# Altium PCB OpenMEA_Power_V002.PcbDoc
Units mm, origin at the board's own origin, x right, y up, seen from the top; angles counter-clockwise.
Board outline 47.35 x 75.04 mm, 4 copper layers (Top Copper Layer, Internal Copper Layer 1, Internal Copper Layer 2, Bottom Copper Layer), stack 1.58 mm thick; 40 components, 27 nets, 139 pads, 18 vias.
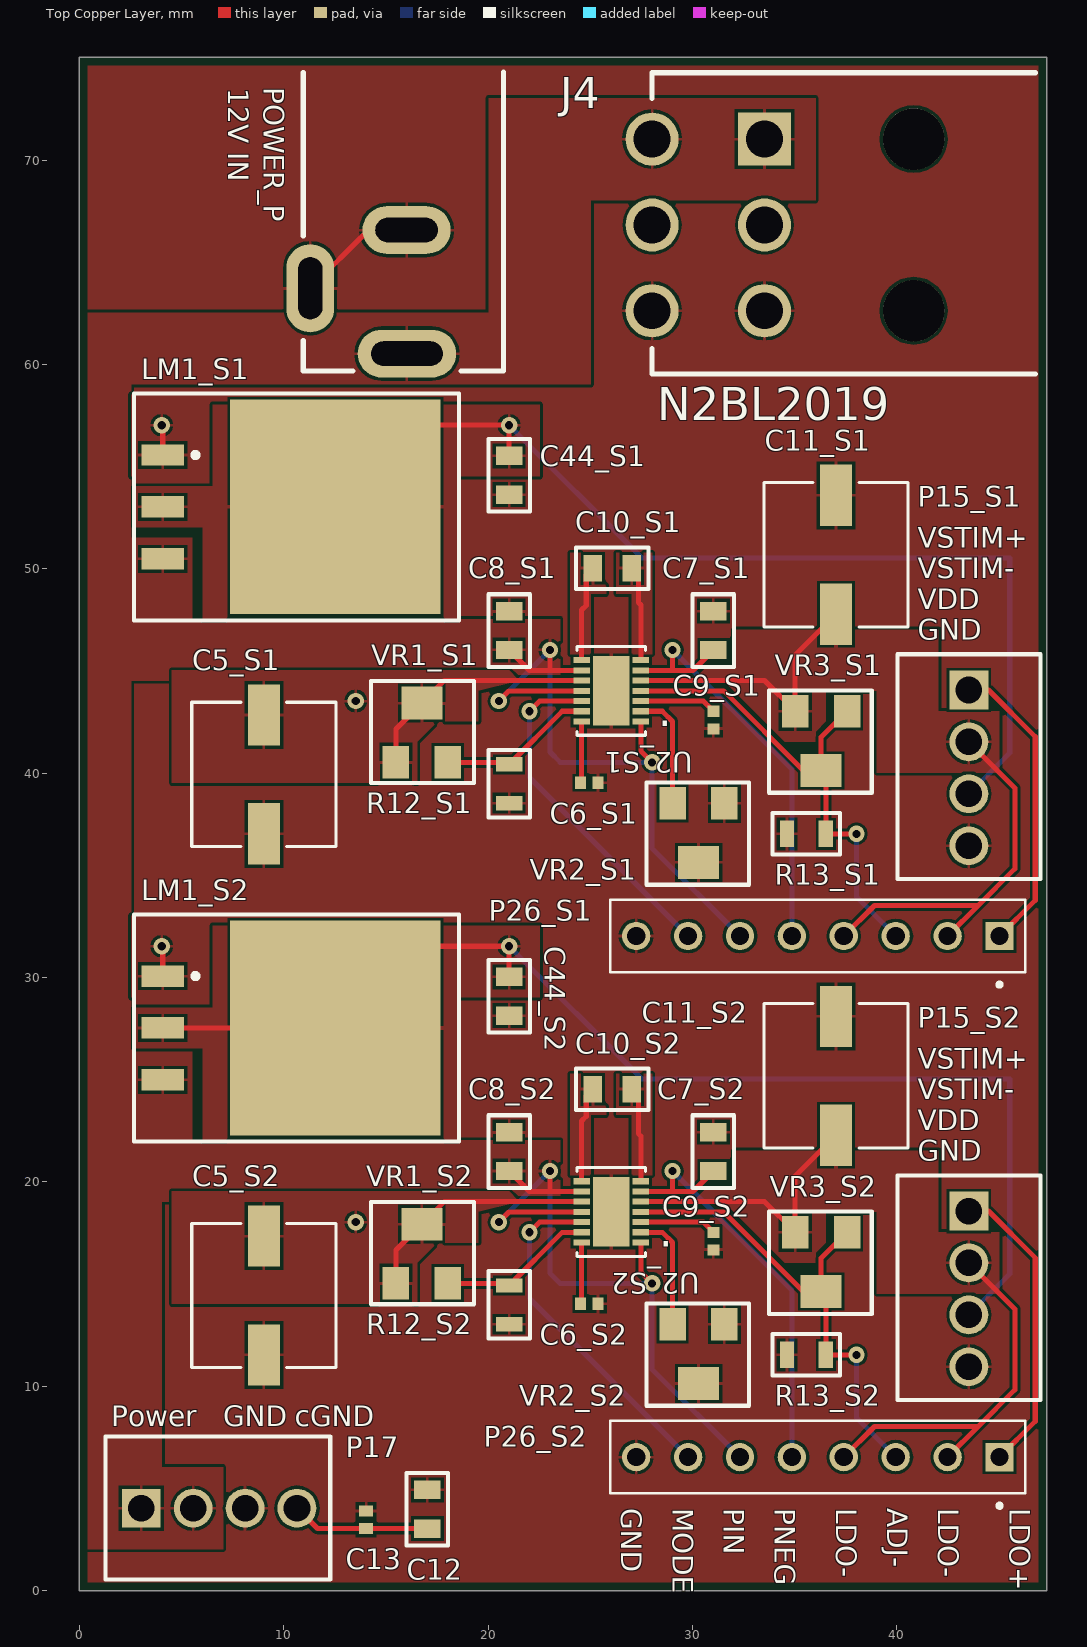
[diagram p0: Top Copper Layer view]
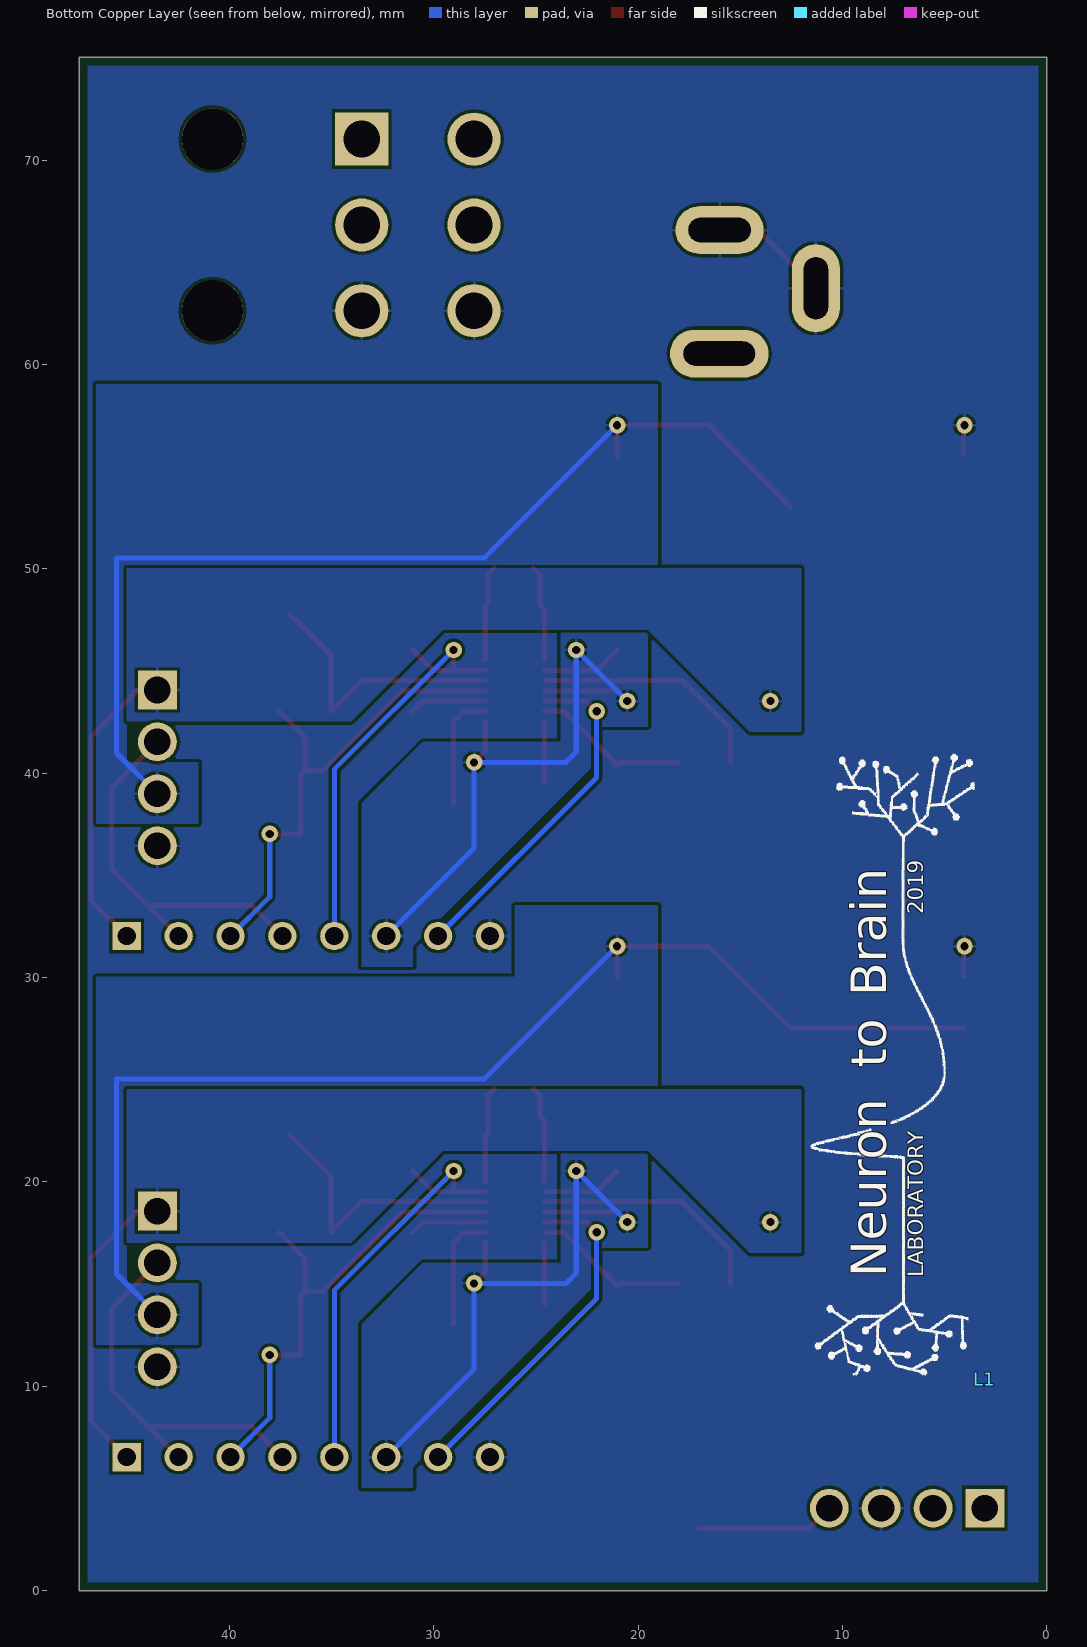
[diagram p1: Bottom Copper Layer view, seen from below]
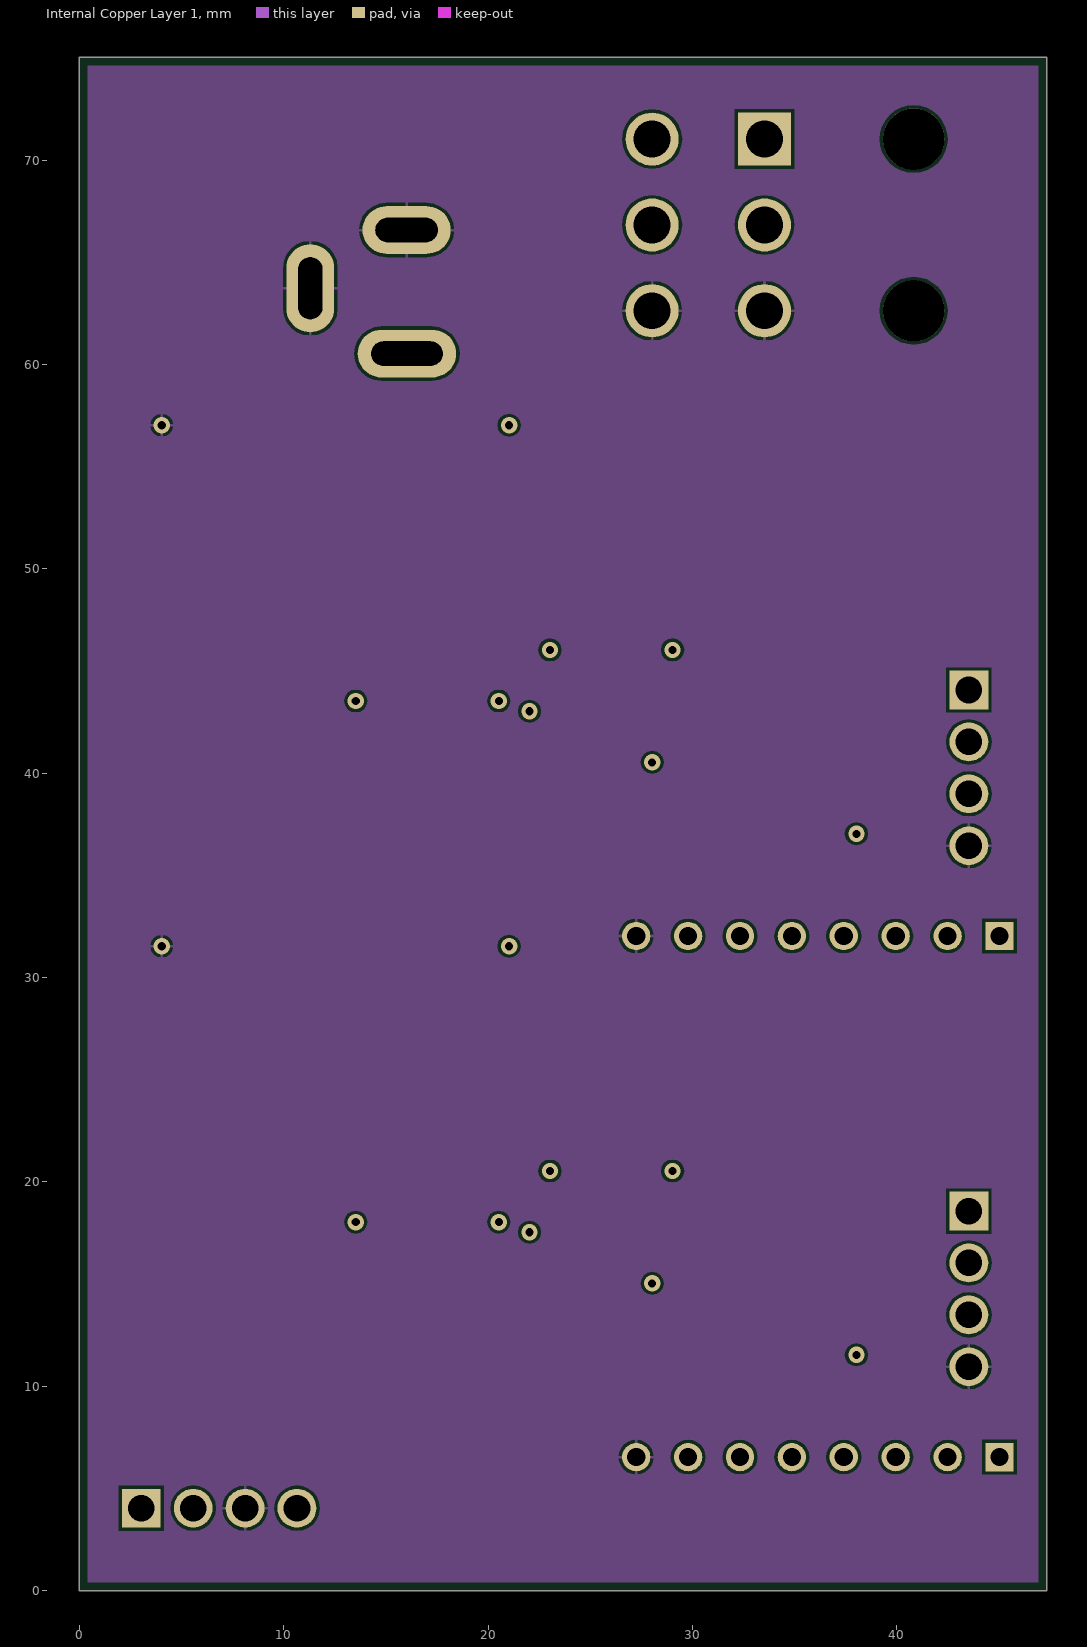
[diagram p2: Internal Copper Layer 1]
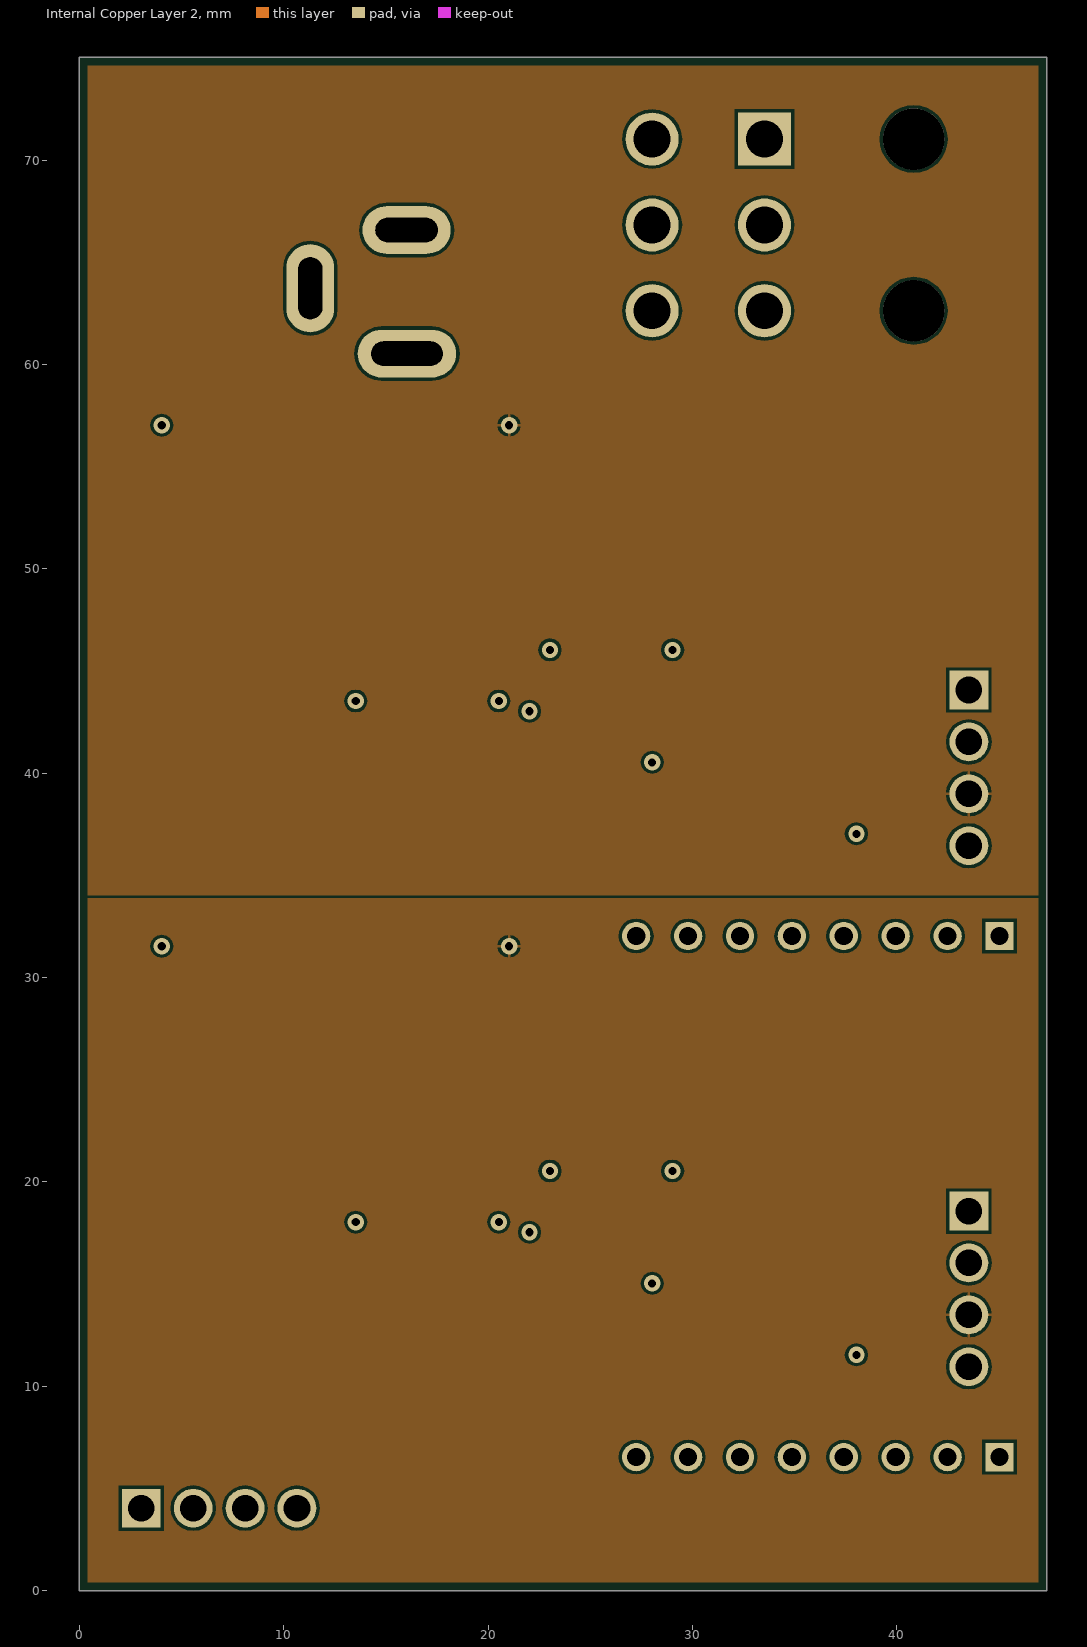
[diagram p3: Internal Copper Layer 2]

## Layer stack, top to bottom
Top Solder: solder mask 0.01, Solder Resist, Dk 3.5
Top Copper Layer: signal copper 0.035
Dielectric 1: prepreg 0.22, FR-4, Dk 4.2
Internal Copper Layer 1: signal copper 0.035
Dielectric 2: core 1, FR-4, Dk 4.2
Internal Copper Layer 2: signal copper 0.035
Dielectric 3: prepreg 0.22, FR-4, Dk 4.2
Bottom Copper Layer: signal copper 0.035
Bottom Solder: solder mask 0.01, Solder Resist, Dk 3.5

## Board outline
0,0 47.346,0 47.346,75.035 0,75.035

## Design rules (kind name [scope] priority, off if disabled: settings)
BoardOutlineClearance [All] p1: gap=0.4 ignorepadtopadclearanceinfootprint=FALSE
Clearance [All] p1: gap=0.15 ignorepadtopadclearanceinfootprint=TRUE
ComponentClearance [All] p1: gap=0.15 collisioncheckmode=3 verticalgap=0.15 showdistances=FALSE
HoleSize [All] p1: absolutevalues=TRUE maxlimit=0.4 minlimit=0.25 maxpercent=80.000 minpercent=20.000
HoleToHoleClearance [All] p1: gap=0.45 allowstackedmicrovias=TRUE
MinimumAnnularRing [All] p1: minimumring=0.15
MinimumSolderMaskSliver [All] p1: minsoldermaskwidth=0.15
PlaneClearance [All] p1: clearance=0.15
PlaneConnect [All] p1: planeconnectstyle=Relief reliefexpansion=0.25 reliefentries=4 reliefconductorwidth=0.15 reliefairgap=0.15
PolygonConnect [All] p1: connectstyle=Relief reliefconductorwidth=0.15 reliefentries=4 polygonreliefangle="90 Angle" airgapwidth=0.15
RoomDefinition OpenMEA_Power_V002 [InComponentClass('OpenMEA_Power_V002')] p1 off: confinementstyle=ConfineIn formatcopy=TRUE lockcomponents=FALSE outline -55.829,-20.592 -5.029,-20.592 -5.029,4.808 -55.829,4.808
RoutingVias [All] p1: holewidth=0.25 width=0.55 viastyle="Through Hole" minholewidth=0.25 minwidth=0.55 maxholewidth=0.4 maxwidth=0.8
SilkToSilkClearance [All] p1: silktosilkclearance=0.2
SilkToSolderMaskClearance [IsPad] p1: minsilkscreentomaskgap=0.2 clearancetoexposedcopper=TRUE
SolderMaskExpansion [All] p1: expansion=0 istentingtop=FALSE
Width [All] p1: maxlimit=50 minlimit=0.15 preferedwidth=0.15
22 further rules are at their usual default settings.

## Classes and differential pairs
component class S1: C5_S1 C6_S1 C7_S1 C8_S1 C9_S1 C10_S1 C11_S1 C44_S1 LM1_S1 P15_S1 P26_S1 R12_S1 R13_S1 U2_S1 VR1_S1 VR2_S1 VR3_S1
component class OpenMEA_Power_V002: C12 C13 J4 L1 P17 POWER_P
component class S2: C5_S2 C6_S2 C7_S2 C8_S2 C9_S2 C10_S2 C11_S2 C44_S2 LM1_S2 P15_S2 P26_S2 R12_S2 R13_S2 U2_S2 VR1_S2 VR2_S2 VR3_S2
channel class vstim_power: S1 S2

## Components (designator, comment, footprint, x,y, rotation, side; value= is the part's Value field where it differs from the comment)
C5_S1 "100uF" CAP_EEFK_D 9.029,39.944 r90 top (schematic designator C5)
C5_S2 "100uF" CAP_EEFK_D 9.029,14.444 r90 top (schematic designator C5)
C6_S1 "capacitor_npol_ame" rcl_0402i_1005m_nominal 24.959,39.535 r180 top value=10nF (schematic designator C6)
C6_S2 "capacitor_npol_ame" rcl_0402i_1005m_nominal 24.959,14.035 r180 top value=10nF (schematic designator C6)
C7_S1 "10uF" C0805 31.029,47.935 r270 top (schematic designator C7)
C7_S2 "10uF" C0805 31.029,22.435 r270 top (schematic designator C7)
C8_S1 "10uF" C0805 21.029,47.935 r270 top (schematic designator C8)
C8_S2 "10uF" C0805 21.029,22.435 r270 top (schematic designator C8)
C9_S1 "capacitor_npol_ame" rcl_0402i_1005m_nominal 31.029,42.605 r90 top value=10nF (schematic designator C9)
C9_S2 "capacitor_npol_ame" rcl_0402i_1005m_nominal 31.029,17.105 r90 top value=10nF (schematic designator C9)
C10_S1 "1uF" C0805 25.129,50.035 r0 top (schematic designator C10)
C10_S2 "1uF" C0805 25.129,24.535 r0 top (schematic designator C10)
C11_S1 "100uF" CAP_EEFK_D 37.029,50.694 r270 top (schematic designator C11)
C11_S2 "100uF" CAP_EEFK_D 37.029,25.194 r270 top (schematic designator C11)
C12 "10uF" C0805 17.029,3.035 r90 top
C13 "capacitor_npol_ame" rcl_0402i_1005m_most 14.029,3.465 r90 top value=100nF
C44_S1 "1uF" C0805 21.029,53.635 r90 top (schematic designator C44)
C44_S2 "1uF" C0805 21.029,28.135 r90 top (schematic designator C44)
J4 "0039301060" 0039301060 33.529,71.035 r90 top
L1 "Logo" N2BL_LOGO 3.029,10.347 r90 bottom
LM1_S1 "3.3V" LM1085 4.079,55.575 r270 top (schematic designator LM1)
LM1_S2 "3.3V" LM1085 4.079,30.075 r270 top (schematic designator LM1)
P15_S1 "Header 4" OSTVN04A150 43.529,44.075 r270 top (schematic designator P15)
P15_S2 "Header 4" OSTVN04A150 43.529,18.575 r270 top (schematic designator P15)
P17 "Header 4" OSTVN04A150 3.029,4.035 r0 top
P26_S1 "Header 8" TE_5-535541-6 36.139,32.035 r180 top (schematic designator P26)
P26_S2 "Header 8" TE_5-535541-6 36.139,6.535 r180 top (schematic designator P26)
POWER_P "PWR2.1MM" POWER2.1MM 16.029,60.535 r90 top
R12_S1 "100KR" R0805 21.029,38.535 r90 top (schematic designator R12)
R12_S2 "100KR" R0805 21.029,13.035 r90 top (schematic designator R12)
R13_S1 "100KR" R0805 36.529,37.035 r180 top (schematic designator R13)
R13_S2 "100KR" R0805 36.529,11.535 r180 top (schematic designator R13)
U2_S1 "Part Number: ltc3260ide" DFN-14_DE 26.029,44.035 r180 top value=Value (schematic designator U2)
U2_S2 "Part Number: ltc3260ide" DFN-14_DE 26.029,18.535 r180 top value=Value (schematic designator U2)
VR1_S1 "Tunable 1M Max" res_var_5turn 15.489,40.535 r0 top (schematic designator VR1)
VR1_S2 "Tunable 1M Max" res_var_5turn 15.489,15.035 r0 top (schematic designator VR1)
VR2_S1 "Tunable 1M Max" res_var_5turn 31.569,38.535 r180 top (schematic designator VR2)
VR2_S2 "Tunable 1M Max" res_var_5turn 31.569,13.035 r180 top (schematic designator VR2)
VR3_S1 "Tunable 1M Max" res_var_5turn 37.569,43.035 r180 top (schematic designator VR3)
VR3_S2 "Tunable 1M Max" res_var_5turn 37.569,17.535 r180 top (schematic designator VR3)

## Footprints (in the part's own frame and the unit in brackets; to place one, negate y for a bottom-side part, rotate by r counter-clockwise, add the part's x,y. Pads: shape width x height; smd on the part's side, far side on the other; paste and mask are expansions set on the pad)
0039301060 [mm]
  rect 2.6x2.6 hole 1.8: 1(0,0)
  round 2.6 hole 1.8: 2(-4.2,0) 3(-8.4,0) 4(0,5.5) 5(-4.2,5.5) 6(-8.4,5.5)
  round 3 hole 3 unplated: M1(0,-7.3) M2(-8.4,-7.3)
  silkscreen extent -11.5,-13.25 3.25,5.5, body extent -11.1,-13.83 3.1,6.1, height 12.4
C0805 [mm]
  rect 0.9x1.3 smd: 1(0,0) 2(1.9,0)
  silkscreen extent -0.83,-1.02 2.73,1.02, body extent -0.05,-0.6 1.95,0.6, height 1.46
CAP_EEFK_D [mil] "CAP ALUM 100UF 20% 35V SMD"
  rect 118x62 smd paste+0 mask+0: 1(-114.5,0) 2(114.5,0)
  silkscreen extent -139,-139 139,139, body extent -154,-134 154,134, height 242
DFN-14_DE [mm]
  rect 0.805x0.3 smd: 1(-1.452,1.5) 2(-1.452,1) 3(-1.452,0.5) 4(-1.452,0) 5(-1.452,-0.5) 6(-1.452,-1) 7(-1.452,-1.5) 8(1.452,-1.5) 9(1.452,-1) 10(1.452,-0.5) 11(1.452,0) 12(1.452,0.5) 13(1.452,1) 14(1.452,1.5)
  rect 1.8x3.4 smd paste-1.687: 15(0,0)
  silkscreen extent -1.68,-2.18 1.68,2.18, body extent 0,0 0.25,0.25, height 0.25
LM1085 [mm] "D2-PAK; 3 Leads; Body 14.4 (inc. leads) x 10.4 mm (LxW max)"
  rect 1.05x2.1 smd: 1(0,0) 2(2.54,0) 3(5.08,0)
  rect 10.5x10.3 smd: 2(2.54,8.45)
  silkscreen extent -3.01,-1.4 8.09,14.5, body extent -2.54,-0.87 7.62,14.37, height 4.54
N2BL_LOGO [mm] "Example template footprint"
  silkscreen extent 0.2,0.49 30.61,8.52
OSTVN04A150 [mm] "4 Position Wire to Board Terminal Block Horizontal with Board 0.100\" (2.54mm) Through Hole"
  rect 1.9x1.9 hole 1.3: 1(0,0)
  round 1.9 hole 1.3: 2(2.54,0) 3(5.08,0) 4(7.62,0)
  silkscreen extent -1.75,-3.5 9.25,3.5, body extent -1.47,-3.25 9.09,3.25, height 8.65
POWER2.1MM [mil]
  oval 92x190 hole 47 slot 138 at 90 deg: 1(0,0)
  oval 170x92 hole 47 slot 120 at 0 deg: 2(126,186.17)
  oval 92x170 hole 47 slot 120 at 90 deg: 3(238.19,0.55)
  silkscreen extent -33,-186 542,200, body extent -25,-178 542,192, height 434
R0805 [mm]
  rect 0.7x1.3 smd: 1(0,0) 2(1.9,0)
  silkscreen extent -0.7,-1.02 2.6,1.02, body extent -0.05,-0.6 1.95,0.6, height 0.71
rcl_0402i_1005m_most [mm] "Chip RCL, 0402 Imperial, 1005 Metric, 2-Leads, Body 1.00x0.5mm, IPC Most Land (Low Density)"
  rect 0.54x0.7 smd: 1(-0.43,0) 2(0.43,0)
  body extent -0.5,-0.25 0.5,0.25, height 0.5
rcl_0402i_1005m_nominal [mm] "Chip RCL, 0402 Imperial, 1005 Metric, 2-Leads, Body 1.00x0.5mm, IPC Nominal Medium Density"
  rect 0.54x0.6 smd: 1(-0.43,0) 2(0.43,0)
  body extent -0.5,-0.25 0.5,0.25, height 0.5
res_var_5turn [mm]
  rect 1.3x1.6 smd: 1(0,0) 3(2.54,0)
  rect 2x1.6 smd: 2(1.27,2.9)
  silkscreen extent -1.21,-1.02 3.82,3.99, body extent -1.1,-0.52 3.7,3.38, height 5.31
TE_5-535541-6 [mil] "CONN RCPT 8POS 0.1 GOLD PCB"
  rect 54.65x54.65 hole 35: 1(-350,0)
  round 54.65 hole 35: 2(-250,0) 3(-150,0) 4(-50,0) 5(50,0) 6(150,0) 7(250,0) 8(350,0)
  silkscreen extent -400,-70 400,98, body extent -400,-70 400,70, height 275

## Part data
C5_S1 C5_S2 C11_S1 C11_S2: library part C2012X5R1E106K085AC, "CAP ALUM 100UF 20% 35V SMD", Dielectric="Electrolytic Capacitor", Dielectric Material=N/A, ESR (Equivalent Series Resistance)="260mOhm @ 100kHz", Manufacturer="Panasonic Electronic Components", Manufacturer Part Number=EEE-FT1V101AP, Max Operating Temperature=105°C, Min Operating Temperature=-55°C, Package Type="Radial Can, SMT", Ripple Current @ High Frequency="300mA @ 100kHz", Ripple Current @ Low Frequency="195mA @ 120Hz", Supplier Part Number 1=PCE5016CT-ND, Tolerance=20%, Voltage Rating=35V, Capacitance=100uF, ComponentLink1Description=Datasheet, ComponentLink1URL=https://industrial.panasonic.com/cdbs/www-data/pdf/RDE0000/ABA0000C1240.pdf, ComponentLink2Description=NamingScheme, ComponentLink2URL=https://industrial.panasonic.com/cdbs/www-data/pdf/RDE0000/DME0000COL90.pdf, Diam.=6.3mm, Height=6.1mm, Length=6.6mm, Mount="Surface Mount", Packaging="Cut Tape (CT)", Polarization=Polarized, Pricing 1="1=0.86;  10=0.605;  100=0.3984  (CAD)", Stock 1=336,289, Supplier 1=Digi-Key, Supplier Link 1=https://www.digikey.ca/product-detail/en/panasonic-electronic-components/EEE-FT1V101AP/PCE5016CT-ND/2652071, Termination=SMD/SMT, Voltage Rating (DC)=35V, Width=6.6mm
C6_S1 C6_S2 C9_S1 C9_S2: "Capacitor Non-polarized American Symbol", Case Code=0402, Manufacturer="Murata Electronics North America", Manufacturer Part Number=GRM155R71E103KA01D, Supplier Part Number 1=490-1312-1-ND, Tolerance=10%, Voltage Rating=25V, ComponentLink1Description="Reference Sheet", ComponentLink1URL=https://search.murata.co.jp/Ceramy/image/img/A01X/G101/ENG/GRM155R71E103KA01-01.pdf, Pricing 1="1=0.14;  10=0.042;  100=0.0188;  500=0.01346;  1000=0.01058;  3500=0.00961;  5000=0.00884  (CAD)", Stock 1=4961, Supplier 1=Digikey, Supplier Link 1=https://www.digikey.ca/products/en?keywords=490-1312-1-ND
C7_S1 C7_S2 C8_S1 C8_S2 C12: library part C2012X5R1E106K085AC, "CAP 10UF", Case/Package=0805, Case Code (Metric)=2012, Dielectric=X5R, Dielectric Material=Ceramic, Manufacturer="Samsung Electro-Mechanics", Manufacturer Part Number=CL21A106KAYNNNE, Max Operating Temperature=85°C, Min Operating Temperature=-55°C, Supplier Part Number 1=1276-2891-1-ND, Tolerance=10%, Voltage Rating=25V, Capacitance=10uF, Case Code (Imperial)=0805, ComponentLink1Description=Specifications, ComponentLink1URL=http://www.samsungsem.com/kr/support/product-search/mlcc/__icsFiles/afieldfile/2018/06/20/CL21A106KAYNNNE.pdf, ComponentLink2Description=Characteristics, ComponentLink2URL=https://media.digikey.com/pdf/Data%20Sheets/Samsung%20PDFs/CL21A106KAYNNNE_Char.pdf, ComponentLink3Description=Datasheet, ComponentLink3URL=https://media.digikey.com/pdf/Data%20Sheets/Samsung%20PDFs/CL_Series_MLCC_ds.pdf, Lead Free="Lead Free", Length=0.079inch, Mount="Surface Mount", Packaging="Tape and Reel", Pricing 1="1=0.39;  10=0.264;  100=0.13340;  500=0.09128;  1000=0.08075  (CAD)", Stock 1=843, Supplier 1=Digi-Key, Supplier Link 1=https://www.digikey.ca/product-detail/en/samsung-electro-mechanics/CL21A106KAYNNNE/1276-2891-1-ND/3890977, Termination=SMD/SMT, Thickness=1.25mm, Voltage Rating (DC)=25V, Width=0.049inch
C10_S1 C10_S2 C44_S1 C44_S2: library part C2012X5R1E105K125AA, "CAP 1UF", Case/Package=0805, Case Code (Metric)=2012, Dielectric=X5R, Dielectric Material=Ceramic, Manufacturer=TDK, Max Operating Temperature=85°C, Min Operating Temperature=-55°C, Package Quantity=2000, Supplier Part Number 1=445-1419-1-ND, Tolerance=10%, Voltage=25V, Capacitance=1uF, Case Code (Imperial)=0805, ComponentLink1Description=https://datasheet.ciiva.com/11787/0900766b80c1bb00-11787608.pdf, ComponentLink1URL=https://datasheet.ciiva.com/11787/0900766b80c1bb00-11787608.pdf, ComponentLink2Description=https://datasheet.ciiva.com/24218/c2012x5r1e105k125aa-264807-24218920.pdf, ComponentLink2URL=https://datasheet.ciiva.com/24218/c2012x5r1e105k125aa-264807-24218920.pdf, ComponentLink3Description=https://datasheet.ciiva.com/16449/e412-c-16449595.pdf, ComponentLink3URL=https://datasheet.ciiva.com/16449/e412-c-16449595.pdf, ComponentLink4Description=https://datasheet.ciiva.com/28602/1744655-28602171.pdf, ComponentLink4URL=https://datasheet.ciiva.com/28602/1744655-28602171.pdf, ComponentLink5Description=https://datasheet.ciiva.com/15192/getdatasheetpartid-726707-15192140.pdf, ComponentLink5URL=https://datasheet.ciiva.com/15192/getdatasheetpartid-726707-15192140.pdf, Composition=Ceramic, Depth=1.25mm, Height=1.25mm, Lead Free="Lead Free", Length=2mm, Manufacturer Part Number=C2012X5R1E105K125AA, Mount="Surface Mount", Number of Pins=2, Packaging="Tape and Reel", Pricing 1="1=0.21, 10=0.146, 100=0.0688, 500=0.0482, 1000=0.0399 (USD)", Radiation Hardening=No, REACH SVHC="No SVHC", Stock 1=517560, Supplier 1=Digi-Key, Supplier Link 1=https://www.digikey.ca/products/en?keywords=445-1419-1-ND, Termination=SMD/SMT, Thickness=0.057inch, Voltage Rating=25V, Voltage Rating (DC)=25V, Weight=0.000194oz, Width=0.049inch
C13: "Capacitor Non-polarized American Symbol", Manufacturer=Yageo, Manuracturer Part Number=CC0402KRX7R8BB104, Package=0402, Supplier Part Number 1=311-2077-1-ND, Voltage Rating=25V, ComponentLink1Description=Datasheet, ComponentLink1URL=http://www.yageo.com/documents/recent/UPY-GPHC_X7R_6.3V-to-50V_18.pdf, Priging 1="1 	0.15000 	$0.15 (CAD)", Stock 1=143,749, Supplier 1=Digikey, Supplier Description 1="CAP CER 0.1UF 25V X7R 0402", Supplier Link 1=https://www.digikey.ca/product-detail/en/yageo/CC0402KRX7R8BB104/311-2077-1-ND/5698948
J4: "CONN HEADER R/A 6POS 4.2MM", Manufacturer=Molex, Supplier Part Number 1=WM1353-ND, ComponentLink1Description=Datasheet, ComponentLink1URL=https://www.molex.com/pdm_docs/sd/039301060_sd.pdf, Manufacturer Part Number=0039301060, Pricing1="1  1.41000  $1.41  10  1.25000  $12.50  100  1.07790  $107.79  500  0.88194  $440.97  1,000  0.78394  $783.94  5,000  0.68595  $3,429.73  10,000  0.65165  $6,516.48 (CAD)", Stock1=8,844, Supplier 1=Digikey, Supplier Link 1=https://www.digikey.ca/product-detail/en/molex/0039301060/WM1353-ND/561080
L1: library part "Neuron To Brain Lab Logo"
LM1_S1 LM1_S2: library part LM1085, "LM1085ISX-3.3/NOPB", Case/Package=TO-263, Dropout Voltage=1.3V, Manufacturer="TI National Semiconductor", Max Input Voltage=27V, Max Operating Temperature=125°C, Max Output Current=3A, Min Current Limit=3.2A, Min Input Voltage=2.6V, Min Operating Temperature=-40°C, Package Quantity=500, Quiescent Current=10mA, Supplier Part Number 1=LM1085ISX-3.3/NOPBCT-ND, ComponentLink1Description=https://datasheet.ciiva.com/15111/getdatasheetpartid-55637-15111252.pdf, ComponentLink1URL=https://datasheet.ciiva.com/15111/getdatasheetpartid-55637-15111252.pdf, ComponentLink2Description=https://datasheet.ciiva.com/26167/lm1085-26167653.pdf, ComponentLink2URL=https://datasheet.ciiva.com/26167/lm1085-26167653.pdf, ComponentLink3Description=https://datasheet.ciiva.com/3223/lm1085-3223480.pdf, ComponentLink3URL=https://datasheet.ciiva.com/3223/lm1085-3223480.pdf, ComponentLink4Description=https://datasheet.ciiva.com/6582/lm1085-6582715.pdf, ComponentLink4URL=https://datasheet.ciiva.com/6582/lm1085-6582715.pdf, ComponentLink5Description=https://datasheet.ciiva.com/34302/1278979-34302139.pdf, ComponentLink5URL=https://datasheet.ciiva.com/34302/1278979-34302139.pdf, ComponentLink6Description=https://datasheet.ciiva.com/6582/lm1085-6582716.pdf, ComponentLink6URL=https://datasheet.ciiva.com/6582/lm1085-6582716.pdf, ComponentLink7Description=https://datasheet.ciiva.com/6582/lm1085-6582718.pdf, ComponentLink7URL=https://datasheet.ciiva.com/6582/lm1085-6582718.pdf, ComponentLink8Description=https://datasheet.ciiva.com/41457/001013599-da-01-en-ic-reg-l-lm1085isx-3-3-nopb-to-263-3-tid-41457356.pdf, ComponentLink8URL=https://datasheet.ciiva.com/41457/001013599-da-01-en-ic-reg-l-lm1085isx-3-3-nopb-to-263-3-tid-41457356.pdf, Contact Plating=Tin,Matte, Height=4.57mm, Lead Free="Contains Lead", Length=10.16mm, Manufacturer Part Number=LM1085ISX-3.3/NOPB, Mount="Surface Mount", Nominal Output Voltage=3.3V, Number of Outputs=1, Number of Pins=3, Number of Regulators=1, Output Current=3A, Output Voltage=3.3V, Packaging="Tape and Reel", Polarity=Positive, Pricing 1="1=2.03, 10=1.826, 100=1.4677 (USD)", Radiation Hardening=No, REACH SVHC="No SVHC", Stock 1=18956, Supplier 1=Digi-Key, Supplier Link 1=https://www.digikey.ca/products/en?keywords=LM1085ISX-3.3%2FNOPBCT-ND, Width=8.64mm
P15_S1 P15_S2 P17: "Header, 4-Pin", Manufacturer="On Shore Technology Inc.", Manufacturer Part Number=OSTVN04A150, Supplier Part Number 1=ED10563-ND, ComponentLink1Description=Datasheet, ComponentLink1URL=http://www.on-shore.com/wp-content/uploads/OSTVNXXA150.pdf, Detailed Description="4 Position Wire to Board Terminal Block Horizontal with Board 0.100\" (2.54mm) Through Hole", LatestRevisionDate=17-Jul-2002, LatestRevisionNote="Re-released for DXP Platform.", Manufacturer Link=https://www.on-shore.com/part/ostvnxxa150-terminal-block-one-piece-rising-clamp/, Pitch (imperial)=100mil, Pricing 1="1  1.38000  $1.38  10  0.96900  $9.69  25  0.90400  $22.60  50  0.82040  $41.02  100  0.81680  $81.68  250  0.68972  $172.43  500  0.65340  $326.70  1,000  0.58080  $580.80  5,000  0.47190  $2,359.50 (CAD)", Publisher="Altium Limited", Stock 1=8,195, Supplier 1=Digikey, Supplier Link 1=https://www.digikey.com/product-detail/en/on-shore-technology-inc/OSTVN04A150/ED10563-ND/1588864
P26_S1 P26_S2: "Header, 8-Pin", Manufacturer="TE Connectivity AMP Connectors", Manufacturer Part Number=5-535541-6, Supplier Part Number 1=A32921-ND, ComponentLink1Description=Datasheet, ComponentLink1URL=https://www.te.com/commerce/DocumentDelivery/DDEController?Action=srchrtrv&DocNm=535541&DocType=Customer+Drawing&DocLang=English, Manufacturer Link=https://www.te.com/usa-en/product-5-535541-6.html, Price1="1  2.79000  $2.79  28  2.37000  $66.36  112  2.16411  $242.38  504  1.80345  $908.94  1,008  1.54581  $1,558.18  5,012  1.37062  $6,869.56  10,024  1.33971  (CAD)", Stock1=2,929, Supplier 1=Digikey, Supplier Link 1=https://www.digikey.ca/product-detail/en/te-connectivity-amp-connectors/5-535541-6/A32921-ND/1092992
POWER_P: "PJ-002AH", Colour=Black, Current Rating=5A, Flammability Rating="UL94 V-0", Insulation Resistance=50MR, Manufacturer=CUI, Max Operating Temperature=85°C, Min Operating Temperature=-25°C, Package Quantity=500, Supplier Part Number 1=CP-002AH-ND, Voltage Rating=24V, ComponentLink1Description=http://www.cui.com/Product/Resource/FuturePDF/PJ-002AH.pdf, ComponentLink1URL=http://www.cui.com/Product/Resource/FuturePDF/PJ-002AH.pdf, ComponentLink2Description=http://www.cui.com/product/resource/digikeypdf/pj-002ah.pdf, ComponentLink2URL=http://www.cui.com/product/resource/digikeypdf/pj-002ah.pdf, ComponentLink3Description=http://www.mouser.com/ds/2/670/pj-002ah-516007.pdf, ComponentLink3URL=http://www.mouser.com/ds/2/670/pj-002ah-516007.pdf, Connector Type=Jack, Contact Gender=Male, Contact Material="Copper,Copper Alloy", Contact Plating=Nickel, Diameter=2.1mm, Gender=Male, Housing Colour=Black, Housing Material=Thermoplastic, Lead Free="Lead Free", Manufacturer Part Number=PJ-002AH, Mount="Through Hole", Number of Conductors=2, Orientation=Horizontal, Packaging=Bulk, Pricing 1="1=0.74, 10=0.696, 25=0.6264, 50=0.5568, 100=0.5336, 250=0.4872, 500=0.464, 1000=0.3828, 2500=0.348 (USD)", Shielding=Unshielded, Stock 1=95768, Supplier 1=Digi-Key, Supplier Link 1=https://www.digikey.ca/products/en?keywords=CP-002AH-ND, Termination="Through Hole"
R12_S1 R12_S2 R13_S1 R13_S2: library part RES100, "CRCW0805100KFKEA", Case/Package=0805, Case Code (Metric)=2012, Manufacturer="Vishay Dale", Max Operating Temperature=155°C, Max Power Dissipation=125mW, Min Operating Temperature=-55°C, Package Quantity=1, Temperature Coefficient=100ppm/°C, Tolerance=1%, Voltage Rating=200V, Case Code (Imperial)=0805, ComponentLink1Description=Datasheet, ComponentLink1URL=http://www.vishay.com/docs/20035/dcrcwe3.pdf, Composition="Thick Film", Lead Free="Lead Free", Length=2mm, Manufacturer Part Number=CRCW0805100KFKEA, Military Standard=Not, Number of Terminations=2, Packaging="Cut Tape (CT)", Power Rating=125mW, Pricing 1="Free with 7PCB", Pricing 2="1=0.15; (CAD)", REACH SVHC=Unknown, Resistance=100KR, Stock 1=286355, Stock2=286,105, Supplier 1=7PCB/Bittele, Supplier2=Digikey, Supplier Link 1=https://parts.7pcb.com/, SupplierLink2=https://www.digikey.ca/product-detail/en/vishay-dale/CRCW0805100KFKEA/541-100KCCT-ND/1181013, Supplier Part Number 1=CRCW0805100KFKEA, Supplier Part Number 2=541-100KCCT-ND, Termination=SMD/SMT, Weight=4mg, Width=1.25mm
U2_S1 U2_S2: library part LTC3260IDE, "IC REG CHARGE PUMP INV 14DFN", Current - Output=100mA, Frequency - Switching="50kHz ~ 500kHz", Manufacturer="Linear Technology/Analog Devices", Manufacturer_Part_Number=ltc3260ide, Manufacturer Part Number=LTC3260EDE#TRPBF, Operating Temperature="-40°C ~ 125°C (TJ)", Package / Case="14-WFDFN Exposed Pad", Supplier Device Package="14-DFN (4x3)", Supplier Part Number 1=LTC3260EDE#TRPBFCT-ND, Voltage - Input (Max)=32V, Voltage - Input (Min)=4.5V, ComponentLink1Description=Datasheet, ComponentLink1URL=http://www.linear.com/docs/41410, Copyright="Copyright (C) 2018 Accelerated Designs. All rights reserved", Detailed Description="Charge Pump Switching Regulator IC Positive and Negative (Dual Rail) Fixed -Vin 2 Output 100mA 14-WFDFN Exposed Pad", Mounting Type="Surface Mount", Output Configuration="Positive and Negative (Dual Rail)", Packaging="Cut Tape (CT)", Pricing1="Price Break  Unit Price  Extended Price  1  13.01000  $13.01  25  9.55440  $238.86  100  7.14360  $714.36  250  6.78644  $1,696.61  500  6.63338  $3,316.69 (CAD)", RefDes=RefDes, Stock1=4,881, Supplier 1=Digikey, Supplier Link 1=https://www.digikey.ca/product-detail/en/linear-technology-analog-devices/LTC3260EDE-TRPBF/LTC3260EDE-TRPBFCT-ND/8433300, Synchronous Rectifier=No, Type=DEV, Vendor="Linear Technology"
VR1_S1 VR1_S2 VR2_S1 VR2_S2 VR3_S1 VR3_S2: library part RES_VAR_5TURN, "TRIMMER 1M OHM 0.25W J LEAD TOP", Manufacturer="Nidec Copal", Manufacturer Part Number=SM-42TW105, Max Operating Temperature=150°C, Max Power Dissipation=250mW, Min Operating Temperature=-65°C, Package Quantity=1, Resistance=1MOhms, Supplier Part Number 1=SM-42TW105CT-ND, Temperature Coefficient=100ppm/°C, Tolerance=10%, ComponentLink1Description=https://www.nidec-copal-electronics.com/e/catalog/trimmer/sm-42&sm-43.pdf, Composition=Cermet, Height=0.201inch, Length=0.189inch, Mount="Surface Mount", Number of Turns=11, Packaging="Cut Tape", Pricing 1="1=5.26;  10=4.604;  25=4.1112 ... (CAD)", Radiation Hardening=No, Stock 1=347, Supplier 1=Digi-Key, Supplier Link 1=https://www.digikey.ca/product-detail/en/nidec-copal-electronics/SM-42TW105/SM-42TW105CT-ND/1632404, Width=0.138inch

## Via types
v1: diameter 0.8, hole 0.4, Top Copper Layer to Bottom Copper Layer, 18 vias

## Nets (pads, with @x,y where several pads share a name; then routed paths per layer and width w, separated by ;. In a path a pad name is that pad's centre, name@x,y a point inside that pad or via, vN(x,y) a via of type N, cw(c..) or ccw(c..) an arc to the next point about the centre after c; other vN are vias at no path point)
ADJ+_S1: R12_S1.2 U2_S1.13 VR1_S1.3 | length 7.7
  Top Copper Layer w0.25: VR1_S1.3 20.929,40.535 R12_S1.2 23.629,43.035 U2_S1.13
ADJ+_S2: R12_S2.2 U2_S2.13 VR1_S2.3 | length 7.7
  Top Copper Layer w0.25: VR1_S2.3 20.929,15.035 R12_S2.2 23.629,17.535 U2_S2.13
ADJ-_S1: P26_S1.3 R13_S1.1 U2_S1.4 VR3_S1.1 VR3_S1.2 | length 24.3
  Top Copper Layer w0.25: U2_S1.4 31.529,44.035 35.429,40.135 VR3_S1.2 ; VR3_S1.1 36.299,41.765 VR3_S1.2 ; v1(38.029,37.035) R13_S1.1 36.529,39.905 VR3_S1.2
  Bottom Copper Layer w0.25: v1(38.029,37.035) 38.029,33.955 P26_S1.3
ADJ-_S2: P26_S2.3 R13_S2.1 U2_S2.4 VR3_S2.1 VR3_S2.2 | length 24.3
  Top Copper Layer w0.25: U2_S2.4 31.529,18.535 35.429,14.635 VR3_S2.2 ; VR3_S2.1 36.299,16.265 VR3_S2.2 ; v1(38.029,11.535) R13_S2.1 36.529,14.405 VR3_S2.2
  Bottom Copper Layer w0.25: v1(38.029,11.535) 38.029,8.455 P26_S2.3
BYP+_S1: C6_S1.2 U2_S1.14 | length 3
  Top Copper Layer w0.25: C6_S1.2@24.577,39.535 U2_S1.14
BYP+_S2: C6_S2.2 U2_S2.14 | length 3
  Top Copper Layer w0.25: C6_S2.2@24.577,14.035 U2_S2.14
BYP-_S1: C9_S1.2 U2_S1.3 | length 3.8
  Top Copper Layer w0.25: U2_S1.3 30.529,43.535 C9_S1.2
BYP-_S2: C9_S2.2 U2_S2.3 | length 3.8
  Top Copper Layer w0.25: U2_S2.3 30.529,18.035 C9_S2.2
EPAD_S1: C5_S1.1 C5_S2.1 C6_S1.1 C6_S2.1 C7_S1.1 C7_S2.1 C8_S1.1 C8_S2.1 C9_S1.1 C9_S2.1 C11_S1.1 C11_S2.1 C12.2 C13.2 C44_S1.1 C44_S2.1 J4.3 J4.6 LM1_S1.1 LM1_S2.1 P15_S1.4 P15_S2.4 P17.3 P26_S1.8 P26_S2.8 POWER_P.2 POWER_P.3 R12_S1.1 R12_S2.1 R13_S1.2 R13_S2.2 U2_S1.15 U2_S2.15 VR2_S1.1 VR2_S1.2 VR2_S2.1 VR2_S2.2 | length 8.9
  Top Copper Layer w0.25: v1(4.029,31.535) 4.079,31.485 LM1_S2.1 ; v1(4.029,57.035) 4.079,56.985 LM1_S1.1 ; POWER_P.2 14.15,66.585 POWER_P.3
LDO+_S1: C5_S1.2 P15_S1.1 P26_S1.1 U2_S1.10 VR1_S1.1 VR1_S1.2 | length 26.4
  Top Copper Layer w0.25: VR1_S1.1 15.489,42.165 VR1_S1.2 17.859,44.535 U2_S1.10 ; P15_S1.1 44.489,44.075 46.779,41.785 46.779,33.785 P26_S1.1
  other v1: 13.529,43.535
LDO+_S2: C5_S2.2 P15_S2.1 P26_S2.1 U2_S2.10 VR1_S2.1 VR1_S2.2 | length 26.4
  Top Copper Layer w0.25: VR1_S2.1 15.489,16.665 17.859,19.035 U2_S2.10 ; P15_S2.1 44.489,18.575 46.779,16.285 46.779,8.285 P26_S2.1
  other v1: 13.529,18.035
LDO-_S1: C11_S1.2 P15_S1.2 P26_S1.2 P26_S1.4 U2_S1.5 VR3_S1.3 | length 32.7
  Top Copper Layer w0.25: U2_S1.5 33.529,44.535 VR3_S1.3 35.029,45.785 C11_S1.2 ; P26_S1.4 38.909,33.535 43.989,33.535 ; P26_S1.2 43.989,33.535 ; P15_S1.2 45.779,39.285 45.779,35.325 43.989,33.535
LDO-_S2: C11_S2.2 P15_S2.2 P26_S2.2 P26_S2.4 U2_S2.5 VR3_S2.3 | length 32.7
  Top Copper Layer w0.25: U2_S2.5 33.529,19.035 VR3_S2.3 35.029,20.285 C11_S2.2 ; P26_S2.4 38.909,8.035 43.989,8.035 ; P26_S2.2 43.989,8.035 ; P15_S2.2 45.779,13.785 45.779,9.825 43.989,8.035
MODE_S1: P26_S1.7 U2_S1.12 | length 17
  Top Copper Layer w0.25: v1(22.029,43.035) 22.529,43.535 U2_S1.12
  Bottom Copper Layer w0.25: v1(22.029,43.035) 22.029,39.795 P26_S1.7
MODE_S2: P26_S2.7 U2_S2.12 | length 17
  Top Copper Layer w0.25: v1(22.029,17.535) 22.529,18.035 U2_S2.12
  Bottom Copper Layer w0.25: v1(22.029,17.535) 22.029,14.295 P26_S2.7
NetC10_S1_1: C10_S1.1 U2_S1.8 | length 4.7
  Top Copper Layer w0.25: U2_S1.8 24.577,47.985 24.804,48.212 24.804,49.71 C10_S1.1
NetC10_S1_2: C10_S1.2 U2_S1.7 | length 4.7
  Top Copper Layer w0.25: C10_S1.2 27.354,49.71 27.354,48.362 27.482,48.235 U2_S1.7
NetC10_S2_1: C10_S2.1 U2_S2.8 | length 4.7
  Top Copper Layer w0.25: U2_S2.8 24.577,22.985 24.804,23.212 24.804,24.21 C10_S2.1
NetC10_S2_2: C10_S2.2 U2_S2.7 | length 4.7
  Top Copper Layer w0.25: C10_S2.2 27.354,24.21 27.354,22.362 27.482,22.235 U2_S2.7
NetU2_S1_2: U2_S1.2 VR2_S1.3 | length 5.8
  Top Copper Layer w0.25: U2_S1.2 28.529,43.035 29.029,42.535 VR2_S1.3
NetU2_S2_2: U2_S2.2 VR2_S2.3 | length 5.8
  Top Copper Layer w0.25: U2_S2.2 28.529,17.535 29.029,17.035 VR2_S2.3
pcGND: C12.1 C13.1 P17.4 | length 6.8
  Top Copper Layer w0.25: P17.4 11.649,3.035 C13.1 C12.1
Power_in_S1: C8_S1.2 C8_S2.2 J4.1 J4.4 LM1_S1.3 LM1_S2.3 P17.1 P17.2 P26_S1.6 P26_S2.6 POWER_P.1 U2_S1.1 U2_S1.9 U2_S1.11 U2_S2.1 U2_S2.9 U2_S2.11 | length 70.9
  Top Copper Layer w0.25: v1(20.529,18.035) 21.029,18.535 U2_S2.11 ; v1(20.529,43.535) 21.029,44.035 U2_S1.11 ; C8_S2.2 22.029,19.535 23.029,19.535 ; C8_S1.2 22.029,45.035 23.029,45.035 ; v1(23.029,20.535) 23.029,19.535 ; v1(23.029,46.035) 23.029,45.035 ; U2_S2.9 23.029,19.535 ; U2_S1.9 23.029,45.035 ; U2_S2.1 27.482,15.583 v1(28.029,15.035) ; U2_S1.1 27.482,41.083 v1(28.029,40.535)
  Bottom Copper Layer w0.25: v1(20.529,18.035) v1(23.029,20.535) 23.029,15.535 23.529,15.035 v1(28.029,15.035) 28.029,10.835 P26_S2.6 ; v1(20.529,43.535) v1(23.029,46.035) 23.029,41.035 23.529,40.535 v1(28.029,40.535) 28.029,36.335 P26_S1.6
Power_neg_S1: C7_S1.2 P26_S1.5 U2_S1.6 | length 21.4
  Top Copper Layer w0.25: U2_S1.6 29.029,45.035 ; v1(29.029,46.035) 29.029,45.035 ; C7_S1.2 30.029,45.035 29.029,45.035
  Bottom Copper Layer w0.25: v1(29.029,46.035) 34.869,40.195 P26_S1.5
Power_neg_S2: C7_S2.2 P26_S2.5 U2_S2.6 | length 21.4
  Top Copper Layer w0.25: U2_S2.6 29.029,19.535 ; v1(29.029,20.535) 29.029,19.535 ; C7_S2.2 30.029,19.535 29.029,19.535
  Bottom Copper Layer w0.25: v1(29.029,20.535) 34.869,14.695 P26_S2.5
powerVDD_S1: C44_S1.2 LM1_S1.2 P15_S1.3 | length 51.2
  Top Copper Layer w0.25: LM1_S1.2@12.529,53.035 16.529,57.035 v1(21.029,57.035) C44_S1.2
  Bottom Copper Layer w0.25: v1(21.029,57.035) 27.529,50.535 45.529,50.535 45.529,40.995 P15_S1.3
powerVDD_S2: C44_S2.2 LM1_S2.2 P15_S2.3 | length 59.7
  Top Copper Layer w0.25: LM1_S2.2@4.079,27.535 12.529,27.535 16.529,31.535 v1(21.029,31.535) C44_S2.2
  Bottom Copper Layer w0.25: v1(21.029,31.535) 27.529,25.035 45.529,25.035 45.529,15.495 P15_S2.3
pads on no net: J4.2 J4.5 J4.M1 J4.M2

## Polygon pours and split planes (outlines as drawn)
LDO+_S2 on Bottom Copper Layer "Top Layer-Power-LDO+" (solid, pour order 577): 12.029,16.535 14.529,16.535 19.529,21.535 29.529,21.535 34.029,17.035 45.029,17.035 45.029,24.535 12.029,24.535
LDO+_S1 on Bottom Copper Layer "Top Layer-Power-LDO+" (solid, pour order 578): 12.029,42.035 14.529,42.035 19.529,47.035 29.529,47.035 34.029,42.535 45.029,42.535 45.029,50.035 12.029,50.035
powerVDD_S1 on Bottom Copper Layer "Top Layer-Power-PowerVDD" (solid, pour order 581): 41.529,37.535 46.529,37.535 46.529,59.035 19.029,59.035 19.029,50.035 45.029,50.035 45.029,40.535 41.529,40.535
Power_in_S1 on Bottom Copper Layer "Top Layer-Power-PowerIn" (solid, pour order 582): 19.529,16.785 19.529,21.535 23.779,21.535 23.794,21.521 23.794,16.05 23.779,16.035 30.529,16.035 33.529,13.035 33.529,5.035 31.029,5.035 31.029,6.035 23.029,14.035 22.779,14.285 22.279,14.785 22.279,16.785
Power_in_S1 on Bottom Copper Layer "Top Layer-Power-PowerIn" (solid, pour order 583): 19.529,42.285 19.529,47.035 23.779,47.035 23.794,47.021 23.794,41.55 23.779,41.535 30.529,41.535 33.529,38.535 33.529,30.535 31.029,30.535 31.029,31.535 23.029,39.535 22.779,39.785 22.279,40.285 22.279,42.285
powerVDD_S2 on Bottom Copper Layer "Top Layer-Power-PowerVDD" (solid, pour order 588): 41.529,12.035 46.529,12.035 46.529,30.035 26.029,30.035 26.029,33.535 19.029,33.535 19.029,24.535 45.029,24.535 45.029,15.035 41.529,15.035
EPAD_S1 on Bottom Copper Layer "Top Layer-Power-PowerGND" (solid, pour order 589): 0.029,75.035 47.279,75.035 47.279,0.035 0.029,0.035
NetC10_S2_1 on Top Copper Layer "Top Layer-Power-NetC10_1" (solid, pour order 569): 25.029,19.785 24.029,19.785 24.029,25.285 25.779,25.285 25.779,23.285 25.029,23.285
NetC10_S1_1 on Top Copper Layer "Top Layer-Power-NetC10_1" (solid, pour order 570): 25.029,45.285 24.029,45.285 24.029,50.785 25.779,50.785 25.779,48.785 25.029,48.785
NetC10_S2_2 on Top Copper Layer "Top Layer-Power-NetC10_2" (solid, pour order 571): 27.029,19.785 27.029,23.285 26.279,23.285 26.279,25.285 28.029,25.285 28.029,19.785
NetC10_S1_2 on Top Copper Layer "Top Layer-Power-NetC10_2" (solid, pour order 572): 27.029,45.285 27.029,48.785 26.279,48.785 26.279,50.785 28.029,50.785 28.029,45.285
LDO+_S2 on Top Copper Layer "Top Layer-Power-LDO+" (solid, pour order 573): 21.529,19.035 21.029,19.535 4.529,19.535 4.529,14.035 16.529,14.035 16.529,16.035 17.529,17.035 19.529,17.035 19.529,18.535
LDO+_S1 on Top Copper Layer "Top Layer-Power-LDO+" (solid, pour order 574): 21.529,44.535 21.029,45.035 4.529,45.035 4.529,39.535 16.529,39.535 16.529,41.535 17.529,42.535 19.529,42.535 19.529,44.035
powerVDD_S2 on Top Copper Layer "Top Layer-Power-PowerVDD" (solid, pour order 575): 2.679,26.535 2.679,28.535 6.529,28.535 6.529,32.535 22.529,32.535 22.529,29.035 18.529,29.035 18.529,22.035 6.029,22.035 6.029,26.535
powerVDD_S1 on Top Copper Layer "Top Layer-Power-PowerVDD" (solid, pour order 576): 2.679,52.035 2.679,54.035 6.529,54.035 6.529,58.035 22.529,58.035 22.529,54.535 18.529,54.535 18.529,47.535 6.029,47.535 6.029,52.035
LDO-_S2 on Top Copper Layer "Top Layer-Power-LDO-" (solid, pour order 579): 30.029,19.035 31.529,19.035 34.529,16.035 36.029,16.035 36.029,16.535 36.529,17.035 36.529,18.535 39.029,18.535 39.029,14.535 45.029,14.535 45.029,17.535 42.029,17.535 42.029,21.535 32.029,21.535 32.029,19.707 30.701,19.707
LDO-_S1 on Top Copper Layer "Top Layer-Power-LDO-" (solid, pour order 580): 30.029,44.535 31.529,44.535 34.529,41.535 36.029,41.535 36.029,42.035 36.529,42.535 36.529,44.035 39.029,44.035 39.029,40.035 45.029,40.035 45.029,43.035 42.029,43.035 42.029,47.035 32.029,47.035 32.029,45.207 30.701,45.207
EPAD_S1 on Top Copper Layer "Top Layer-Power-GND" (solid, pour order 584): 2.529,29.035 2.529,33.035 6.029,33.035 6.029,29.035
EPAD_S1 on Top Copper Layer "Top Layer-Power-GND" (solid, pour order 585): 2.529,54.535 2.529,58.535 6.029,58.535 6.029,54.535
Power_in_S1 on Top Copper Layer "Top Layer-Power-PowerIn" (solid, pour order 586): 0.029,2.035 7.029,2.035 7.029,6.035 4.029,6.035 4.029,19.035 23.529,19.035 23.529,22.035 5.529,22.035 5.529,26.535 2.529,26.535 2.529,44.535 23.529,44.535 23.529,47.535 5.529,47.535 5.529,51.535 2.529,51.535 2.529,59.035 25.029,59.035 25.029,68.035 36.029,68.035 36.029,73.035 20.029,73.035 20.029,62.535 0.029,62.535 0.029,51.535 0.029,44.535 0.029,20.535 0.029,19.035
EPAD_S1 on Top Copper Layer "Top Layer-Power-PowerGND" (solid, pour order 587): 0.029,75.035 47.279,75.035 47.279,0.035 0.029,0.035
powerVDD_S1 on Internal Copper Layer 2 "Sig2-Power-VDD1" (solid, pour order 621): 0.029,75.035 47.279,75.035 47.279,34.035 0.029,34.035
powerVDD_S2 on Internal Copper Layer 2 "Sig2-Power-VDD2" (solid, pour order 623): 0.029,34.035 47.279,34.035 47.279,0.035 0.029,0.035
EPAD_S1 on Internal Copper Layer 1 "Sig2-Power-GND" (solid, pour order 625): 0.029,75.035 47.279,75.035 47.279,0.035 0.029,0.035

## Silkscreen, mask and mechanical layers (free items; w line width, h text height)
Top Overlay:
  text "12V IN" at 7.279,73.535 h1 r270
  text "N2BL2019" at 28.279,57.285 h1.6
  text "VSTIM+" at 41.029,51.035 h1
  text "VSTIM-" at 41.029,49.535 h1
  text "VDD" at 41.029,48.035 h1
  text "GND" at 41.029,46.535 h1
  text "." at 28.342,42.295 h1.52
  text "VSTIM+" at 41.029,25.535 h1
  text "VSTIM-" at 41.029,24.035 h1
  text "VDD" at 41.029,22.535 h1
  text "GND" at 41.029,21.035 h1
  text "." at 28.367,16.819 h1.52
  text "Power" at 1.569,8.035 h1
  text "GND" at 7.029,8.035 h1
  text "cGND" at 10.529,8.035 h1
  text "GND" at 26.529,4.035 h1 r270
  text "MODE" at 29.029,4.035 h1 r270
  text "PIN" at 31.529,4.035 h1 r270
  text "PNEG" at 34.029,4.035 h1 r270
  text "LDO-" at 37.029,4.035 h1 r270
  text "ADJ-" at 39.529,4.035 h1 r270
  text "LDO-" at 42.029,4.035 h1 r270
  text "LDO+" at 45.529,4.035 h1 r270
PCB Info - M3:
  lines w0.198: 47.279,0.035 0.029,0.035 0.029,75.035 47.279,75.035

## Text inside footprints (layer, text, board x,y; h text height)
L1: Bottom Overlay "Neuron" at 7.279,15.347 h3 r270; Bottom Overlay "Brain" at 7.279,29.097 h3 r270; Bottom Overlay "to" at 7.279,25.597 h3 r270; Bottom Overlay "LABORATORY" at 5.779,15.347 h1.3 r270; Bottom Overlay "2019" at 5.779,33.097 h1.3 r270